# Altium PCB Skumpad.PcbDoc
Units mil, origin at the board's own origin, x right, y up, seen from the top; angles counter-clockwise.
Board outline 4015.75 x 4015.75 mil, 2 copper layers (Top Layer, Bottom Layer); 46 components, 37 nets, 164 pads, 41 vias.
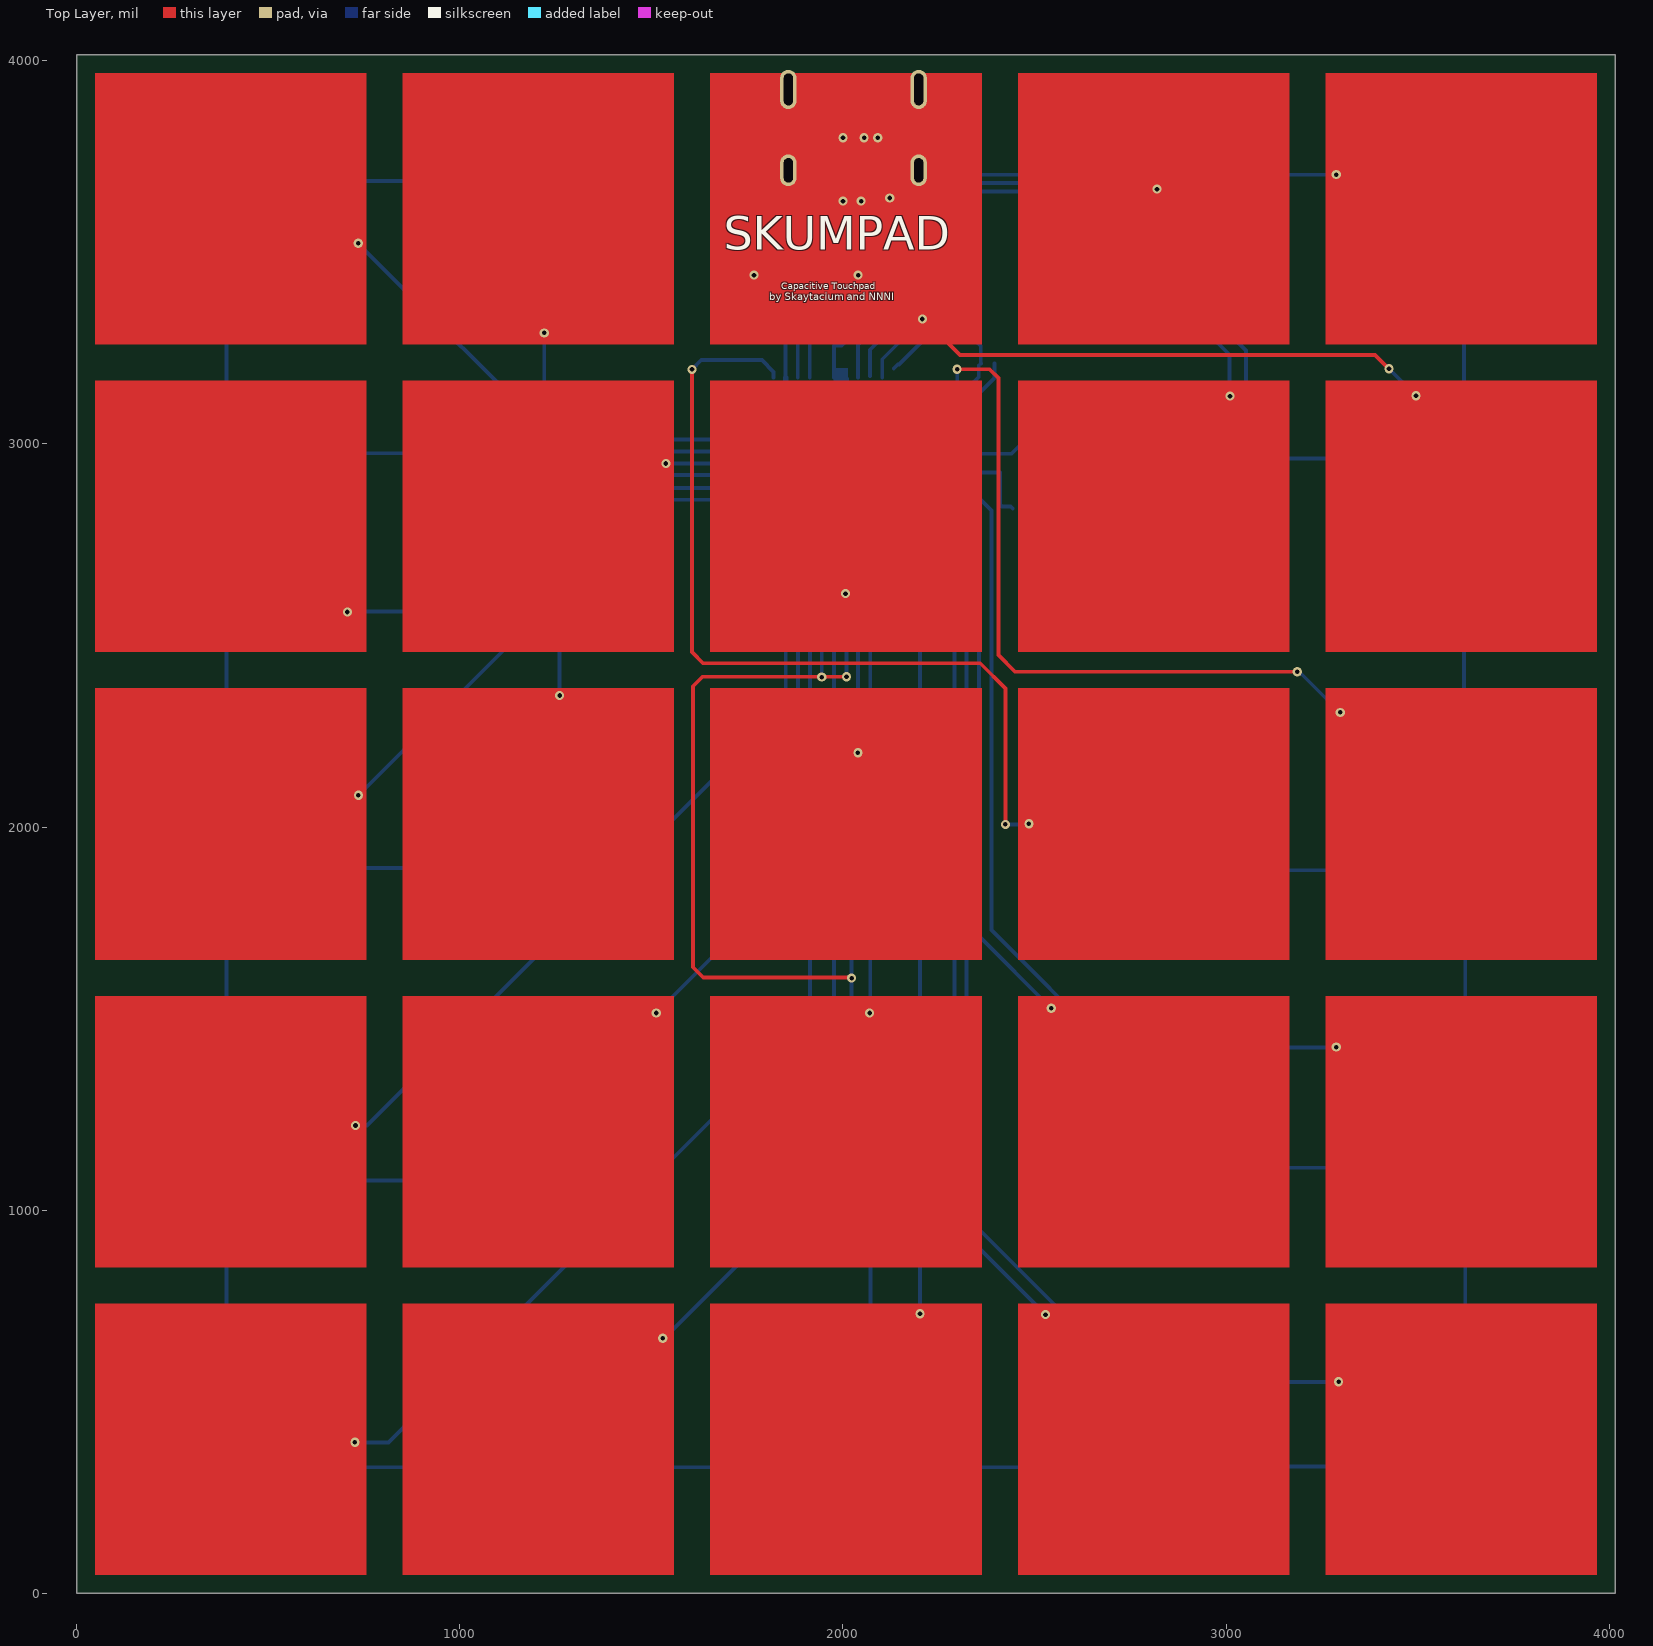
[diagram p0: Top Layer view]
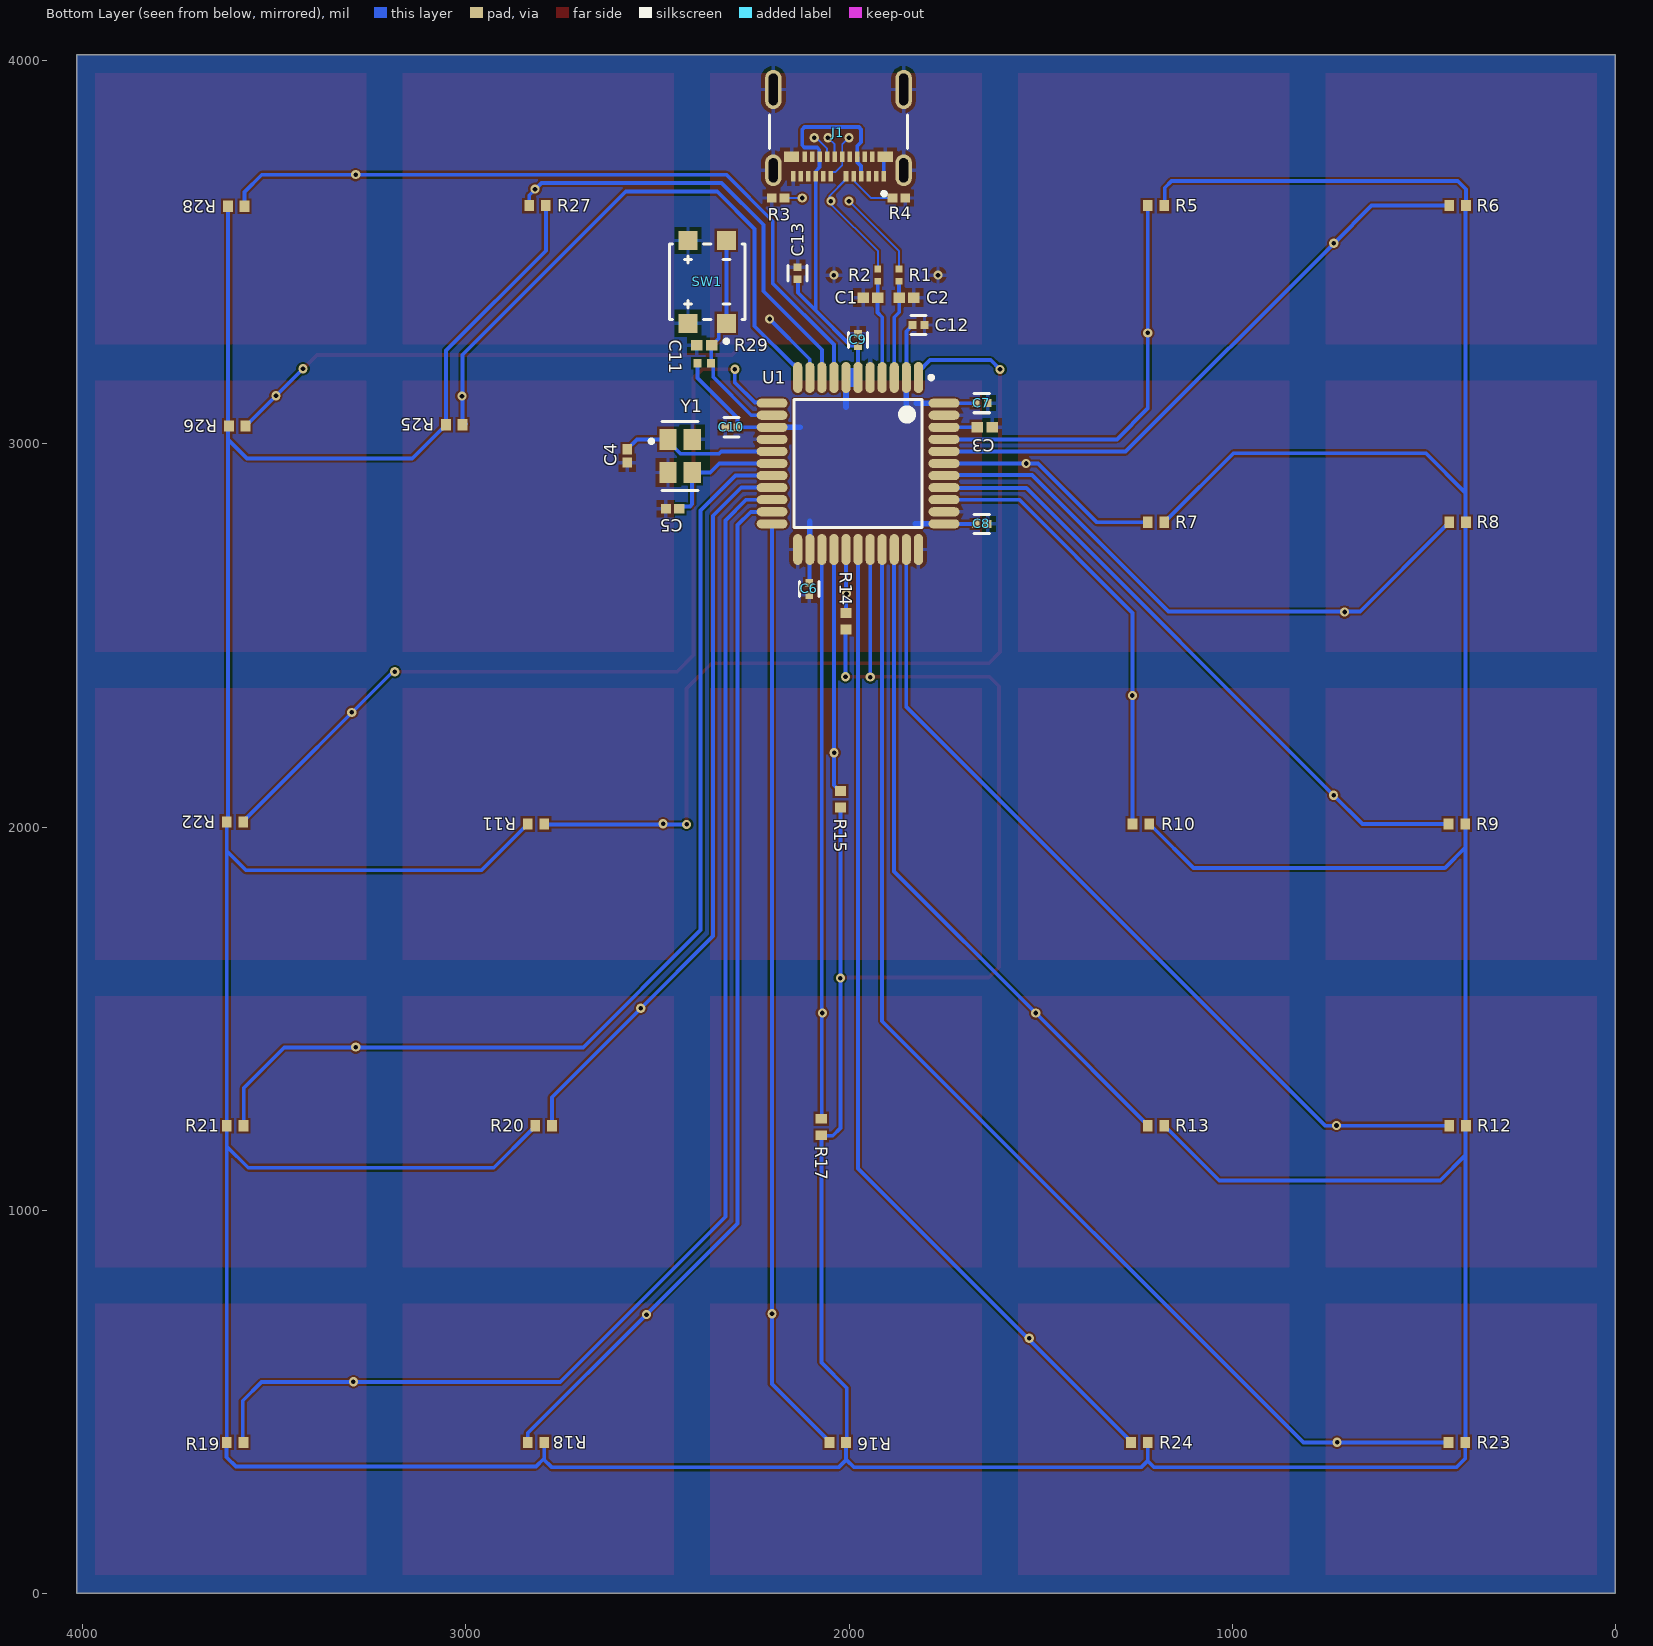
[diagram p1: Bottom Layer view, seen from below]

## Layer stack, top to bottom
Top Solder: solder mask 0.4, Solder Resist, Dk 3.5
Top Layer: signal copper 1.4
Dielectric 1: dielectric 12.6, FR-4, Dk 4.8
Bottom Layer: signal copper 1.4
Bottom Solder: solder mask 0.4, Solder Resist, Dk 3.5

## Board outline
0,0 0,4015.75 4015.75,4015.75 4015.75,0

## Design rules (kind name [scope] priority, off if disabled: settings)
Clearance [All] p1: gap=5 ignorepadtopadclearanceinfootprint=TRUE except(0: Arc-Hole Track-Hole SMDPad-Hole THPad-Hole Via-Hole Fill-Hole Poly-Hole Region-Hole Text-Hole; 10: SMDPad-SMDPad)
PolygonConnect [All] p1: connectstyle=Relief reliefconductorwidth=10 reliefentries=4 polygonreliefangle="90 Angle" airgapwidth=10
RoomDefinition Skematic [InComponentClass('Skematic')] p1: confinementstyle=ConfineIn formatcopy=TRUE lockcomponents=FALSE outline 4059.05,55.12 4279.52,55.12 4279.52,767.71 4059.05,767.71
RoutingVias [All] p1: holewidth=28 width=50 viastyle="Through Hole" minholewidth=28 minwidth=50 maxholewidth=28 maxwidth=50
SolderMaskExpansion [All] p1: expansion=4 istentingtop=FALSE
Width Width_1 [All] p1: maxlimit=50 minlimit=5 preferedwidth=10 minimp=50.000000 maximp=50.000000 favimp=50.000000
30 further rules are at their usual default settings.

## Components (designator, comment, footprint, x,y, rotation, side; value= is the part's Value field where it differs from the comment)
C1 "47pF" CAPC1005X55X30ML05T10 1944.49,3381.5 r180 bottom
C2 "47pF" CAPC1005X55X30ML05T10 1850,3381.5 r180 bottom
C3 "100nF" CAPC1050X55X23ML05T13 1645.67,3043.31 r0 bottom
C4 "22pF" CAPC1005X56X25NL10T15 2578.74,2968.5 r90 bottom
C5 "22pF" CAPC1005X56X25NL10T15 2460.63,2830.71 r180 bottom
C6 "100nF" FP-C0402-BB-MFG 2103.86,2621.58 r270 bottom value="0.10 μF"
C7 "100nF" FP-C0402-BB-MFG 1653.54,3106.3 r180 bottom value="0.10 μF"
C8 "100nF" FP-C0402-BB-MFG 1653.54,2791.34 r180 bottom value="0.10 μF"
C9 "100nF" FP-C0402-BB-MFG 1976.38,3271.65 r90 bottom value="0.10 μF"
C10 "100nF" FP-C0402-BB-MFG 2307.09,3043.31 r0 bottom value="0.10 μF"
C11 "100nF" CAPC1050X55X23ML05T13 2377.95,3257.48 r0 bottom
C12 "100nF" FP-C0402-BB-MFG 1818.76,3310.19 r180 bottom value="0.10 μF"
C13 "100nF" FP-C0402-BB-MFG 2134.15,3445.29 r90 bottom value="0.10 μF"
J1 "1054500101" FP-1054500101-MFG 2027.56,3846.46 r0 bottom
R1 "22R" RESC1005X40X25LL05T05 1869.68,3440.55 r90 bottom
R2 "22R" RESC1005X40X25LL05T05 1924.8,3440.55 r90 bottom
R3 "5.1K" RESC1005X40X25NL10T10 2185.04,3641.73 r0 bottom
R4 "5.1K" RESC1005X40X25NL10T10 1870.08,3641.73 r180 bottom
R5 "1M" RESC0402(1005)_M 1198.82,3622.05 r180 bottom value="1000000.00 Ohm"
R6 "1M" RESC0402(1005)_M 411.42,3622.05 r180 bottom value="1000000.00 Ohm"
R7 "1M" RESC0402(1005)_M 1198.82,2795.28 r180 bottom value="1000000.00 Ohm"
R8 "1M" RESC0402(1005)_M 411.42,2795.28 r180 bottom value="1000000.00 Ohm"
R9 "1M" RESC0402(1005)_M 413.39,2007.87 r180 bottom value="1000000.00 Ohm"
R10 "1M" RESC0402(1005)_M 1238.19,2007.87 r180 bottom value="1000000.00 Ohm"
R11 "1M" RESC0402(1005)_M 2816.93,2007.87 r0 bottom value="1000000.00 Ohm"
R12 "1M" RESC0402(1005)_M 411.42,1220.47 r180 bottom value="1000000.00 Ohm"
R13 "1M" RESC0402(1005)_M 1198.82,1220.47 r180 bottom value="1000000.00 Ohm"
R14 "1M" RESC0402(1005)_M 2007.92,2537.23 r270 bottom value="1000000.00 Ohm"
R15 "1M" RESC0402(1005)_M 2022.23,2072.44 r270 bottom value="1000000.00 Ohm"
R16 "1M" RESC0402(1005)_M 2029.53,393.7 r180 bottom value="1000000.00 Ohm"
R17 "1M" RESC0402(1005)_M 2072.24,1216.89 r270 bottom value="1000000.00 Ohm"
R18 "1M" RESC0402(1005)_M 2816.93,393.7 r180 bottom value="1000000.00 Ohm"
R19 "1M" RESC0402(1005)_M 3602.36,393.7 r0 bottom value="1000000.00 Ohm"
R20 "1M" RESC0402(1005)_M 2797.24,1220.47 r0 bottom value="1000000.00 Ohm"
R21 "1M" RESC0402(1005)_M 3602.36,1220.47 r0 bottom value="1000000.00 Ohm"
R22 "1M" RESC0402(1005)_M 3602.77,2012.98 r0 bottom value="1000000.00 Ohm"
R23 "1M" RESC0402(1005)_M 413.39,393.7 r180 bottom value="1000000.00 Ohm"
R24 "1M" RESC0402(1005)_M 1242.13,393.7 r180 bottom value="1000000.00 Ohm"
R25 "1M" RESC0402(1005)_M 3030.26,3050.31 r0 bottom value="1000000.00 Ohm"
R26 "1M" RESC0402(1005)_M 3596.68,3046.54 r0 bottom value="1000000.00 Ohm"
R27 "1M" RESC0402(1005)_M 2812.99,3622.05 r180 bottom value="1000000.00 Ohm"
R28 "1M" RESC0402(1005)_M 3599.6,3620.32 r0 bottom value="1000000.00 Ohm"
R29 "10K" RESC1005X40X25NL05T05 2377.95,3210.24 r180 bottom
SW1 "7914G-1-000E" BOUR-7914G-1-000E_V 2370.08,3422.83 r0 bottom
U1 "ATmega32U4-AU" 44ML_M 1976.38,2948.82 r270 bottom
Y1 "TSX-3225 16.0000MF18X-AC0" FP-TSX-3225-MFG 2440.94,2968.5 r270 bottom

## Footprints (in the part's own frame and the unit in brackets; to place one, negate y for a bottom-side part, rotate by r counter-clockwise, add the part's x,y. Pads: shape width x height; smd on the part's side, far side on the other; paste and mask are expansions set on the pad)
44ML_M [mm] "Thin QFP, 44-Leads, Body 10x10mm, Pitch 0.8mm, IPC Low Density"
  oval 2.05x0.6 smd: 1(-5.7,4) 2(-5.7,3.2) 3(-5.7,2.4) 4(-5.7,1.6) 5(-5.7,0.8) 6(-5.7,0) 7(-5.7,-0.8) 8(-5.7,-1.6) 9(-5.7,-2.4) 10(-5.7,-3.2) 11(-5.7,-4) 23(5.7,-4) 24(5.7,-3.2) 25(5.7,-2.4) 26(5.7,-1.6) 27(5.7,-0.8) 28(5.7,0) 29(5.7,0.8) 30(5.7,1.6) 31(5.7,2.4) 32(5.7,3.2) 33(5.7,4)
  oval 0.6x2.05 smd: 12(-4,-5.7) 13(-3.2,-5.7) 14(-2.4,-5.7) 15(-1.6,-5.7) 16(-0.8,-5.7) 17(0,-5.7) 18(0.8,-5.7) 19(1.6,-5.7) 20(2.4,-5.7) 21(3.2,-5.7) 22(4,-5.7) 34(4,5.7) 35(3.2,5.7) 36(2.4,5.7) 37(1.6,5.7) 38(0.8,5.7) 39(0,5.7) 40(-0.8,5.7) 41(-1.6,5.7) 42(-2.4,5.7) 43(-3.2,5.7) 44(-4,5.7)
  silkscreen extent -5.82,-4.25 4.25,4.97, body extent -5,-5 5,5, height 1.2
BOUR-7914G-1-000E_V [mm] "SMD, 4-Leads, Body 5x5mm, Height 4.49mm"
  rect 1.27x1.27 smd: 1(-1.27,2.75) 2(1.27,2.75) 3(1.27,-2.75) 4(-1.27,-2.75)
  silkscreen extent -2.5,-2.5 2.5,4.06, body extent -2.5,-3.1 2.5,3.1, height 4.11
CAPC1005X55X30ML05T10 [mm] "Chip Capacitor, 2-Leads, Body 1.00x0.50mm, IPC Low Density"
  rect 0.76x0.72 smd: 1(-0.48,0) 2(0.48,0)
  body extent -0.53,-0.28 0.53,0.27, height 0.55
CAPC1005X56X25NL10T15 [mm] "Chip Capacitor, 2-Leads, Body 1.00x0.50mm, IPC Medium Density"
  rect 0.68x0.64 smd: 1(-0.44,0) 2(0.44,0)
  body extent -0.55,-0.3 0.55,0.3, height 0.56
CAPC1050X55X23ML05T13 [mm] "Chip Capacitor, 2-Leads, Body 1.05x0.55mm, IPC Low Density"
  rect 0.76x0.72 smd: 1(-0.49,0) 2(0.49,0)
  body extent -0.53,-0.28 0.53,0.27, height 0.55
FP-1054500101-MFG [mm]
  rrect100% 1.1x2.1 hole 1.6 slot 0.6 at 0 deg paste-1000 mask+0: 1(-4.32,3.36) 2(4.32,3.36)
  rrect100% 1.1x2.6 hole 2.1 slot 0.6 at 0 deg paste-1000 mask+0: 3(-4.32,-2) 4(4.32,-2)
  rect 0.3x0.7 smd paste+0 mask+0: A1(-3,3.77) A2(-2.5,3.77) A3(-2,3.77) A4(-1.5,3.77) A5(-1,3.77) A6(-0.5,3.77) A7(0.5,3.77) A8(1,3.77) A9(1.5,3.77) A10(2,3.77) A11(2.5,3.77) A12(3,3.77) B2(2.25,2.47) B3(1.75,2.47) B4(1.25,2.47) B5(0.75,2.47) B6(0.25,2.47) B7(-0.25,2.47) B8(-0.75,2.47) B9(-1.25,2.47) B10(-1.75,2.47) B11(-2.25,2.47)
  rect 1x0.7 smd paste+0 mask+0: B1(3.1,2.47) B12(-3.1,2.47)
  silkscreen extent -4.57,-0.3 4.57,5.03
FP-C0402-BB-MFG [mm]
  rect 0.52x0.52 smd paste+0 mask+0: 1(-0.4,0) 2(0.4,0)
  silkscreen extent -0.5,-0.64 0.5,0.64, body extent -0.5,-0.25 0.5,0.25, height 0.55
FP-TSX-3225-MFG [mm]
  rect 1.4x1.15 smd paste+0 mask+0: 1(-1.1,-0.8) 2(1.1,-0.8) 3(1.1,0.8) 4(-1.1,0.8)
  silkscreen extent -2.3,-2.02 2.3,1.2, body extent -1.6,-1.25 1.6,1.25, height 0.6
RESC0402(1005)_M [mm] "Chip Resistor, Body 1.0x0.5mm, IPC Low Density"
  rect 0.65x0.75 smd: 1(-0.55,0) 2(0.55,0)
  body extent -0.52,-0.28 0.53,0.28, height 0.4
RESC1005X40X25LL05T05 [mm] "Chip Resistor, 2-Leads, Body 1.00x0.50mm, IPC High Density"
  rect 0.45x0.45 smd: 1(-0.4,0) 2(0.4,0)
  body extent -0.53,-0.27 0.53,0.28, height 0.4
RESC1005X40X25NL05T05 [mm] "Chip Resistor, 2-Leads, Body 1.00x0.50mm, IPC Medium Density"
  rect 0.55x0.55 smd: 1(-0.45,0) 2(0.45,0)
  body extent -0.53,-0.27 0.53,0.28, height 0.4
RESC1005X40X25NL10T10 [mm] "Chip Resistor, 2-Leads, Body 1.00x0.50mm, IPC Medium Density"
  rect 0.65x0.6 smd: 1(-0.425,0) 2(0.425,0)
  body extent -0.55,-0.3 0.55,0.3, height 0.4

## Part data
C1 C2: library part CMP-2008-03283-1, Manufacturer=Kemet, Part Number=C0402C470J5GACTU
C3 C11: library part CMP-2000-05439-1, "Chip Capacitor, 100 nF, +/- 10%, 16 V, -55 to 125 degC, 0402 (1005 Metric), RoHS, Tape and Reel", Capacitance=100000pF, Case Size/Dimension=0402, Dielectric=X7R, Manufacturer="Samsung Electro-Mechanics", Rated Voltage=16V, Tolerance (%)=±10%, Datasheet URL=https://datasheet.ciiva.com/29198/458718-da-01-en-vs-kondensator-0402-29198423.pdf, Datasheet Version=Nov-10, Manufacturer URL=http://www.samsungsem.com/global/index.jsp
C4 C5: library part CMP-2008-02613-1, Manufacturer="AVX Interconnect / Elco", Part Number=04025A220JAT2A
C6 C7 C8 C9 C10 C12 C13: library part CMP-03020-023811-1, "CAP CER 0.1UF 10V X5R 0402", Capacitance="0.10 μF", Manufacturer=Kemet, Manufacturer Part Number=C0402C104K8PACTU, Package=C0402-BB, Temperature="-55°C to +125°C", Temperature Characteristic=X5R, Temperature Coefficient=15%, Temperature Range High=+125°C, Temperature Range Low=-55°C, Tolerance=0.1, Voltage Rating="10 V", Automotive=No, Category=Cap, ComponentLink2Description=Datasheet, ComponentLink2URL=https://content.kemet.com/datasheets/KEM_C1002_X7R_SMD.pdf, Device Class L1="Passive Components", Device Class L2=Capacitors, Device Class L3="Ceramic Capacitors", Digikey Description="CAP CER 0.1UF 10V X5R 0402", Height=0.55mm, Ipc Land Pattern Name=CAPC10050X50, Lead Free=Yes, Material=Ceramic, Mouser Description="Capacitor 100 nF 10 VDC 0402", Octopart=https://octopart.com/c0402c104k8pactu-kemet-140039, RoHS=TRUE
J1: library part CMP-04767-000004-1, "CONN RCP USB3.1 TYPEC 24P SMD RA", Current Rating=0.25/1.25/5A, Manufacturer=Molex, Package=0, Temperature="-30°C to +85°C", Temperature Range High=+85°C, Temperature Range Low=-30°C, Voltage Rating=30V, Automotive=No, Category=Conn, ComponentLink2Description=Datasheet, ComponentLink2URL=https://www.molex.com/webdocs/datasheets/pdf/en-us/1054500101_IO_CONNECTORS.pdf, Conn Orientation="Right Angle", Contact Material=Gold,Nickel, Device Class L1=Connectors, Device Class L2="USB Connectors", Device Class L3=unset, Digikey Description="CONN RCP USB3.1 TYPEC 24P SMD RA", Footprint Url=https://www.molex.com/pdm_docs/sd/1054500101_sd.pdf, Height=3.44mm, Is Female=yes, Lead Free=Yes, Manufacturer Part Number=1054500101, Mouser Description="USB Shielded I/O Receptacle; Type C; Right Angle; Surface Mount; Gold over Nickel", Number Of Contacts=24, Octopart=https://octopart.com/105450-0101-molex-68082325, Pitch=0.5mm, RoHS=TRUE, Shielding=true, Usb Standard="USB 3.1"
R1 R2: library part CMP-2002-08382-1, Manufacturer="Vishay Dale", Part Number=CRCW040222R0FKED
R3 R4: library part CMP-2002-05812-1, Manufacturer=Panasonic, Part Number=ERA-2AEB512X
R5 R6 R7 R8 R9 R10 R11 R12 R13 R14 R15 R16 R17 R18 R19 R20 R21 R22 R23 R24 R25 R26 R27 R28: library part CMP-1011-00849-1, "1M 0.063W 1% 0402 (1005 Metric)  SMD", Case-EIA=0402, Case-Metric=1005, Power="0.063 W", Tolerance="1 %", Technology=SMT
R29: library part CMP-2002-01183-1, Manufacturer=Panasonic, Part Number=ERT-J0ER103J
SW1: library part CMP-2000-05692-1, "SPST Gull Wing Sealed Key Switch, 100 mA, 16 V, -55 to 125 degC, 4-Pin SMD, RoHS, Tape and Reel", Actuator Color=N/A, Contact Rating @ Voltage=0.1A, Dielectric Strength=250VAC, Manufacturer=Bourns, Maximum AC Voltage Rating=16V, Maximum Contact Resistance=100mOhm, Minimum Insulation Resistance=100MOhm, Operating Force=2.94N, Operating Temperature=-55to125C, Package Description="4-Pin Surface Mount Device, Body 5 x 5 mm, Height 4.49 mm", Actuator Length=1.65mm, Actuator Style=RoundButton, Base Material=Thermoplastic, Body Orientation=Straight, Contact Material=Gold, Contact Plating=N/A, COO=TW, Datasheet URL=http://www.bourns.com/docs/Product-Datasheets/7914.pdf, Datasheet Version=08/2016, Dimension=5x6.2x4.19mm, ECCN=EAR99, Electrical Life=N/A, Family=7914, Ground Terminal=No, Housing Material=N/A, HTS=8536509065, Illumination Type=N/R, Manufacturer URL=http://www.bourns.com/, Maximum DC Voltage Rating=16V, Mechanical Life=100000Cycles, Mounting=SurfaceMount,GullWing, Mounting Technology=SurfaceMount, Package Reference=7914G-1-000E, Packaging=EmbossedTapeandReel, Part No=7914G-1-000E, Pole Throw Configuration=SPST, Product Weight=N/A, RoHS=Yes, Seal Description=N/A, Seal Location=N/A, Supplier=Bourns, Switch Configuration=N.O., Type=KeySwitch
U1: library part CMP-0095-00285-2, "8-bit AVR Microcontroller, 2.7-5.5V, 16MHz, 32KB Flash, 1KB EEPROM, 2.5KB SRAM, USB Controller, 44-pin TQFP, Industrial Grade (-40°C to 85°C), Ext Osc", ComponentLink1Description="Manufacturer URL", ComponentLink1URL=http://www.atmel.com/, ComponentLink2Description="ATmega16U4/32U4 Datasheet", ComponentLink2URL=http://www.atmel.com/dyn/resources/prod_documents/doc7766.pdf, ComponentLink3Description="ATmega16U4 ATmega32U4 Summary", ComponentLink3URL=http://www.atmel.com/dyn/resources/prod_documents/7766S.pdf, DatasheetVersion="revF, Nov-2010", PackageDescription="44-Pin Plastic Thin Quad Flat Pack, 10 x 10 x 1.0 mm Body, 0.8 mm Pitch (TQFP)", PackageReference=44ML, PackageVersion="rev.G, Jul-2007", RevisionNote="DatasheetVersion updated. URLs added."
Y1: library part CMP-36405-000005-1, "CRYSTAL 16.00 MHZ 9PF SMD", Frequency=16MHz, Load Capacitance=9pF, Manufacturer=EPSON, Package=TSX-3225, Temperature="-40°C to +85°C", Temperature Range High=+85°C, Temperature Range Low=-40°C, Tolerance=10ppm, Automotive=No, Category=Crys, ComponentLink2Description=Datasheet, ComponentLink2URL=https://support.epson.biz/td/api/doc_check.php?dl=brief_TSX-3225&lang=en, Device Class L1="Passive Components", Device Class L2="Crystals / Oscillators", Device Class L3=Crystals, Digikey Description="CRYSTAL 16.00 MHZ 9PF SMD", ESR=60Ω, Height=0.6mm, Lead Free=Yes, Manufacturer Part Number="TSX-3225 16.0000MF18X-AC0", Mouser Description="CRYSTAL 16.00 MHZ 9PF SMD", Octopart=https://octopart.com/tsx-3225+16.0000mf18x-ac0-epson-58756552, RoHS=TRUE, Series=TSX-3225, Stability=18ppm

## Via types
v1: diameter 24, hole 12, Top Layer to Bottom Layer, tented top, 24 vias
v2: diameter 24, hole 12, Top Layer to Bottom Layer, 17 vias

## Nets (pads, with @x,y where several pads share a name; then routed paths per layer and width w, separated by ;. In a path a pad name is that pad's centre, name@x,y a point inside that pad or via, vN(x,y) a via of type N, cw(c..) or ccw(c..) an arc to the next point about the centre after c; other vN are vias at no path point)
+5: C6.1 C7.1 C8.1 C9.1 C10.1 C12.1 C13.1 J1.A4 J1.A9 J1.B4 J1.B9 R29.1 U1.2 U1.6 U1.7 U1.14 U1.24 U1.34 U1.44 | length 2266.6
  Bottom Layer w10: C8.1 U1.34 ; C7.1 U1.44 ; C12.1@1835.54,3309.15 1839.74,3304.95 1839.74,3304.64 1850.22,3294.16 1850.22,3225.98 U1.2@1850.22,3173.99 ; U1.2 U1.2@1850.9,3172.72 ; J1.A4 1968.5,3725.23 1977.44,3734.16 1977.44,3748.31 J1.B9 1978.35,3777.56 1968.5,3787.4 1968.5,3820.91 1974.36,3826.77 2116.19,3826.77 2122.05,3820.91 2122.05,3779.6 2116.19,3773.74 2083.54,3773.74 2077.68,3767.88 2077.68,3750.12 J1.B4 2076.77,3722.02 2085.71,3713.08 2085.71,3698.94 J1.A9 2086.61,3347.71 ; U1.6 C9.1 1977.32,3256.85 1995.76,3256.85 2086.61,3347.71 ; U1.24@2102.23,2722.61 2103.11,2721.74 2103.11,2638.07 C6.1 ; C13.1@2133.45,3429.09 2133.45,3394.54 2086.61,3347.71 ; U1.14 C10.1 2291.34,3067.93 2395.67,3172.26 R29.1
  Bottom Layer w15: U1.44 1824.69,3106.3 ; U1.34@1754.38,2791.34 1827.1,2791.34 ; 1850.9,3100 U1.2@1850.9,3172.72 ; 2007.87,3096.57 U1.7@2007.87,3169.29 ; U1.24 2102.36,2797.13 ; 2128.07,3043.31 U1.14
GND: C1.1 C2.2 C3.1 C4.1 C5.1 C6.2 C7.2 C8.2 C9.2 C10.2 C11.2 C12.2 C13.2 J1.1 J1.2 J1.3 J1.4 J1.A1 J1.A12 J1.B1 J1.B12 R3.2 R4.2 SW1.2 SW1.3 U1.5 U1.15 U1.23 U1.33 U1.35 U1.43 Y1.2 Y1.4 | length 52.8
  Bottom Layer w10: J1.B12 1909.45,3745.28 J1.A1
  other v2: 1767.72,3440.55 2039.37,3440.55
NetC1_2: C1.2 R2.1 U1.4 | length 257
  Bottom Layer w10: U1.4 1913.39,3330.71 1925.59,3342.91 C1.2 1925.2,3381.89 1925.2,3424.41 R2.1
NetC2_1: C2.1 R1.1 U1.3 | length 257.3
  Bottom Layer w10: R1.1 1869.29,3424.41 1869.29,3381.89 C2.1 1868.9,3343.7 1881.89,3330.71 U1.3
NetC3_2: C3.2 U1.42 | length 87
  Bottom Layer w10: C3.2 U1.42
NetC4_2: C4.2 U1.16 Y1.1 | length 410.1
  Bottom Layer w10: U1.16 2332.89,2980.31 2338.96,2974.25 2439.8,2974.25 2472.44,3006.89 Y1.1 2553.54,3011.81 2578.74,2986.61 C4.2
NetC5_2: C5.2 U1.17 Y1.3 | length 339.9
  Bottom Layer w10: U1.17 2338.58,2948.82 2362.2,2925.2 Y1.3 2409.45,2842.52 2415.31,2836.66 2437.35,2836.66 C5.2
NetC11_1: C11.1 R29.2 SW1.1 SW1.4 U1.13 | length 562.5
  Bottom Layer w10: U1.13 2255.03,3074.8 2354.41,3174.18 R29.2@2354.41,3204.41 ; SW1.4 SW1.1 2340.08,3294.57 2340.08,3275.28 2359.45,3255.91 2359.45,3211.02 R29.2
NetJ1_A5: J1.A5 R4.1 | length 130.9
  Bottom Layer w5: R4.1 1942.5,3641.73 1984.78,3684.02 1984.78,3694.63 J1.A5
NetJ1_A6: J1.A6 J1.B6 R2.2 | length 548.2
  Top Layer w5: v2(2047.24,3633.86) 2047.24,3791.34 v2(2055.12,3799.21)
  Bottom Layer w5: R2.2 1924.8,3503.54 2047.24,3625.98 v2(2047.24,3633.86) 2047.85,3633.86 2051.48,3637.49 2051.48,3646.55 2007.87,3690.16 J1.A6 J1.A6@2011.28,3701.44 ; J1.B6@2034,3745.81 J1.B6 2037.4,3781.5 v2(2055.12,3799.21)
NetJ1_A7: J1.A7 J1.B7 R1.2 | length 522
  Top Layer w5: v2(2000,3633.86) v2(2000,3799.21)
  Bottom Layer w5: R1.2 1869.68,3503.54 v2(2000,3633.86) ; v2(2000,3799.21) 2017.72,3781.5 J1.B7 2017.72,3727.93 2036.34,3709.31 2043.84,3709.31 2047.24,3705.91 J1.A7
NetJ1_B5: J1.B5 R3.1 | length 283.4
  Top Layer w5: v2(2090.55,3799.21) 2122.05,3767.72 v2(2122.05,3641.73)
  Bottom Layer w5: J1.B5 2057.09,3770.49 2085.81,3799.21 v2(2090.55,3799.21) ; v2(2122.05,3641.73) R3.1
NetR5_1: R5.1 U1.41 | length 1094.7
  Bottom Layer w10: R5.1 1220.47,3289.7 1220.47,3092.13 1300.79,3011.81 U1.41
  other v1: 1220.11,3289.7
NetR5_2: R5.2 R6.2 R7.2 R8.2 R9.2 R10.2 R11.2 R12.2 R13.2 R14.2 R15.2 R16.2 R17.2 R18.2 R19.2 R20.2 R21.2 R22.2 R23.2 R24.2 R25.2 R26.2 R27.2 R28.2 U1.29 | length 20303.4
  Top Layer w10: v2(2009.14,2392.29) 1633.6,2392.29 1608.62,2367.32 1608.62,1633.89 1635.37,1607.14 v2@2022.61,1607.14
  Bottom Layer w10: R23.2@390.75,398.51 390.75,1143.54 ; R23.2 391.73,351.5 414.2,329.02 1203.58,329.02 1220.47,345.92 ; R13.2@1176.14,1220.85 1176.14,1217.47 1169.37,1210.71 1166.69,1210.71 1033.5,1077.51 456.78,1077.51 390.75,1143.54 ; R7.2 1177.17,2797.24 1169.37,2805.04 1167.4,2805.04 996.9,2975.54 494.24,2975.54 390.75,2872.05 ; R5.2 1177.17,3624.61 1175.83,3625.94 1175.83,3668.43 1158.2,3686.07 411.02,3686.07 389.76,3664.82 R6.2 390.75,3621.06 390.75,2872.05 ; R10.2@1215.14,2007.51 1215.14,2004.51 1208.74,1998.11 1205.74,1998.11 1100.6,1892.97 444.86,1892.97 390.75,1947.08 ; R24.2 1220.47,345.92 ; v2@1944.18,2394.64 1944.63,2395.09 1944.63,2724.16 U1.29 ; 2005.29,346.84 1987.55,329.1 1236.47,329.1 1220.47,345.1 1220.47,345.92 ; R16.2@2005.91,402.89 2005.91,536.18 2072.24,602.52 R17.2 ; R14.2@2007.21,2514.48 2009.14,2512.55 v2(2009.14,2392.29) ; R16.2 2007.87,347.67 2026.44,329.1 2776.85,329.1 2796.63,348.89 2796.63,350.93 ; R15.2 2022.23,1214.59 2042.48,1194.34 R17.2@2071.2,1194.34 ; R27.2 2791.34,3504.05 3051.91,3243.48 R25.2 ; R18.2 2795.28,352.29 2796.63,350.93 ; R20.2@2817.91,1219.98 2817.91,1219.49 2826.69,1210.71 2827.19,1210.71 2927.41,1110.48 3568.03,1110.48 3624.02,1166.47 ; R11.2 2959.38,1887.07 3574.23,1887.07 3624.22,1937.06 ; R25.2@3051.91,3048.34 3059.71,3040.55 3061.67,3040.55 3139.94,2962.28 3571.15,2962.28 3620.66,3011.79 ; R28.2 3620.66,3619.73 3620.66,3011.79 ; R21.2 3624.02,1166.47 ; R21.2@3624.43,1224.93 3624.22,1225.15 3624.22,1937.06 ; 390.75,1143.54 390.75,1947.08 ; 390.75,1947.08 390.75,2872.05 ; 2796.63,350.93 2817.1,330.47 3600.25,330.47 3624.81,355.03 3624.81,397.32 3624.02,398.11 3624.02,1166.47 ; 3620.66,3011.79 3620.66,2016.74 R22.2 3624.22,2012.78 3624.22,1937.06
  other v2: 2022.5,1605.69 1944.38,2391.38
NetR6_1: R6.1 U1.40 | length 1585.2
  Bottom Layer w10: R6.1 635.87,3622.05 734.58,3523.34 1278.16,2979.76 1751.41,2979.76 U1.40
  other v1: 734.91,3523.67
NetR7_1: R7.1 U1.39 | length 597.5
  Bottom Layer w10: R7.1 1352.85,2795.28 1506.47,2948.9 1537.71,2948.9 U1.39@1754.38,2948.9
  other v1: 1537.71,2948.78
NetR8_1: R8.1 U1.38 | length 1564.6
  Bottom Layer w10: R8.1 433.07,2793.31 440.87,2785.51 442.83,2785.51 665.75,2562.6 706.38,2562.6 1166.41,2562.6 1522.33,2918.51 1751.33,2918.51 U1.38@1752.28,2917.55
  other v1: 706.38,2561.17
NetR9_1: R9.1 U1.37 | length 1677.7
  Bottom Layer w10: R9.1 659.94,2007.87 v1(735.14,2083.06) 1537.18,2885.11 U1.37@1749.42,2885.11
NetR10_1: R10.1 U1.36 | length 1169.6
  Bottom Layer w10: R10.1 1259.84,2343.27 1259.84,2558.86 1555.31,2854.33 U1.36 1752.98,2854.33 U1.36@1755.14,2856.49
  other v1: 1260.31,2343.27
NetR11_1: R11.1 U1.1 | length 2572.7
  Top Layer w10: v2(1605.85,3194.34) 1605.85,2456.62 1635,2427.47 2358.11,2427.47 2424.06,2361.52 v2(2424.06,2006.75)
  Bottom Layer w10: v2(1605.85,3194.34) 1630.1,3218.58 1788.2,3218.58 1818.9,3187.89 U1.1 ; v2(2424.06,2006.75) R11.1@2796.26,2006.75
  other v1: 2485.15,2008.37
NetR12_1: R12.1 U1.32 | length 2274
  Bottom Layer w10: R12.1 727.57,1220.47 757.99,1220.47 1850.39,2312.88 U1.32@1850.39,2717.1
  other v1: 727.57,1221.04
NetR13_1: R13.1 U1.31 | length 1773.7
  Bottom Layer w10: R13.1 1220.47,1222.44 1512.68,1514.64 1882.33,1884.3 U1.31@1882.33,2720.04
  other v1: 1512.84,1514.48
NetR14_1: R14.1 U1.27 | length 163.9
  Bottom Layer w5: R14.1@2007.16,2559.65 R14.1 ; U1.27@2007.87,2722.5 U1.27@2008.59,2723.22
  Bottom Layer w10: R14.1@2007.87,2560.7 2007.87,2609.33 U1.27@2007.87,2722.5
  other v1: 2006.65,2609.33
NetR15_1: R15.1 U1.26 | length 638.6
  Bottom Layer w10: R15.1 2024.2,2094.09 2039.06,2108.95 2039.06,2193.87 2039.06,2724.1 U1.26
  other v1: 2039.03,2193.87
NetR16_1: R16.1 U1.22 | length 2458.9
  Bottom Layer w10: R16.1 2051.18,395.67 2201.42,545.91 2201.42,729.66 U1.22@2201.42,2790.34
  other v1: 2200.91,729.66
NetR17_1: R17.1 U1.25 | length 1491.2
  Bottom Layer w10: U1.25@2071.01,2725.31 2071.01,1514.57 2071.01,1246.01 2078.8,1238.22 R17.1@2079.67,1238.22
  other v1: 2069.55,1514.57
NetR18_1: R18.1 U1.21 | length 2721.5
  Bottom Layer w10: U1.21@2205,2822.49 2256.65,2822.49 2291.04,2788.1 2291.04,965.46 2528.96,727.54 2838.58,417.92 R18.1
  other v1: 2528.69,727.27
NetR19_1: R19.1 U1.20 | length 3526.7
  Bottom Layer w10: U1.20 2268.64,2854.33 2322.61,2800.36 2322.61,982.64 2753.89,551.37 3293.62,551.37 3533.3,551.37 3582.29,502.38 R19.1@3582.29,396.16
  other v1: 3293.62,552.25
NetR20_1: R20.1 U1.19 | length 1948.4
  Bottom Layer w10: U1.19 2281.31,2885.83 2354.72,2812.42 2354.72,1715.68 2543.67,1526.73 2775.59,1294.8 R20.1@2775.59,1222.67
  other v1: 2543.79,1526.85
NetR21_1: R21.1 U1.18 | length 2779.8
  Bottom Layer w10: U1.18 2296.53,2917.32 2387.31,2826.54 2387.31,1730.97 2693.73,1424.55 3287.4,1424.55 3474.15,1424.55 3579.97,1318.73 R21.1@3579.97,1222.09
  other v1: 3287.4,1425.57
NetR22_1: R22.1 U1.12 | length 2353.5
  Top Layer w10: v2@2300.15,3199.29 2304.45,3194.98 2382.73,3194.98 2405.92,3171.79 2405.92,2448.67 2449.34,2405.25 v2(3185.5,2405.25)
  Bottom Layer w10: U1.12 2202.4,3107.91 2245.63,3107.91 2298.13,3160.41 v2@2298.13,3194.37 ; v2(3185.5,2405.25) 3190.81,2405.25 3580.78,2015.28 R22.1@3580.78,2010.18
  other v1: 3297.86,2299.07
  other v2: 2297.99,3194.98
NetR23_1: R23.1 U1.30 | length 3168.3
  Bottom Layer w10: R23.1 725.95,393.7 814.06,393.7 1913.53,1493.18 U1.30@1913.53,2727.57
  other v1: 725.95,393.96
NetR24_1: R24.1 U1.28 | length 2625.2
  Bottom Layer w10: R24.1 1263.78,395.67 1531.61,663.5 1976.38,1108.27 1976.38,2722.67 U1.28@1977.13,2723.43
  other v1: 1529.52,665.6
NetR25_1: R25.1 U1.11 | length 1579.3
  Bottom Layer w10: U1.11@2132.37,3196.6 2142.83,3207.06 2146.49,3207.06 2246.44,3307.01 2246.44,3561.07 2343.84,3658.48 2582.79,3658.48 3008.6,3232.67 3008.6,3124.83 R25.1 ; R25.1@2999.75,3051.91 R25.1@3003.99,3051.91
  other v1: 3010.27,3124.83
NetR26_1: R26.1 U1.10 | length 1674.3
  Top Layer w10: v2(2207.21,3325.91) 2212.12,3325.91 2305.59,3232.44 3388.9,3232.44 v2@3424.23,3197.11
  Bottom Layer w10: U1.10 2102.36,3221.06 v2(2207.21,3325.91) ; v2(3425.16,3196.18) R26.1@3572.12,3049.22
  other v1: 3495.74,3125.76
NetR27_1: R27.1 U1.9 | length 1154.2
  Bottom Layer w10: U1.9@2070.72,3177.52 2070.72,3245.62 2223.59,3398.49 2223.59,3572 2332.73,3681.13 2802.39,3681.13 2819.12,3664.4 2834.65,3648.87 R27.1
  other v1: 2819.64,3664.92
NetR28_1: R28.1 U1.8 | length 1959.1
  Bottom Layer w10: U1.8 2039.37,3259.48 2198.89,3419.01 2198.89,3581.29 2320.12,3702.51 3287.68,3702.51 3532.68,3702.51 3577.95,3657.25 R28.1
  other v1: 3287.68,3702.77
pads on no net: J1.A2 J1.A3 J1.A8 J1.A10 J1.A11 J1.B2 J1.B3 J1.B8 J1.B10 J1.B11

## Polygon pours and split planes (outlines as drawn)
+5 on Bottom Layer "+5_L02_P003" (solid, pour order 3): 1809.05,3116.14 1809.05,2781.5 2143.7,2781.5 2143.7,3116.14
GND on Bottom Layer "GND_L02_P001" (solid, remove dead copper, pour order 1): 0,4015.75 4015.75,4015.75 4015.75,0 0,0
GND on Bottom Layer "NONET_L02_P002" (hatched 45Degree grid 35 track 8, remove dead copper, shelved, pour order 2): 0,4015.75 4015.75,4015.75 4015.75,0 0,0

## Other copper
Top Layer:
  rectangle net GND: 1653.54,3259.84 2362.2,3968.5
  rectangle net NetR13_1: 850.39,850.39 1559.06,1559.06
  rectangle net NetR17_1: 1653.54,850.39 2362.2,1559.06
  rectangle net NetR19_1: 3259.84,47.24 3968.5,755.91
  rectangle net NetR21_1: 3259.84,850.39 3968.5,1559.06
  rectangle net NetR22_1: 3259.84,1653.54 3968.5,2362.2
  rectangle net NetR26_1: 3259.84,2456.69 3968.5,3165.35
  rectangle net NetR28_1: 3259.84,3259.84 3968.5,3968.5
  rectangle net NetR6_1: 47.24,3259.84 755.91,3968.5
  rectangle net NetR8_1: 47.24,2456.69 755.91,3165.35
  rectangle: 47.24,1653.54 755.91,2362.2
  rectangle net NetR12_1: 47.24,850.39 755.91,1559.06
  rectangle net NetR23_1: 47.24,47.24 755.91,755.91
  rectangle net NetR24_1: 850.39,47.24 1559.06,755.91
  rectangle net NetR10_1: 850.39,1653.54 1559.06,2362.2
  rectangle net NetR7_1: 850.39,2456.69 1559.06,3165.35
  rectangle net NetR5_1: 850.39,3259.84 1559.06,3968.5
  rectangle net NetR14_1: 1653.54,2456.69 2362.2,3165.35
  rectangle net NetR15_1: 1653.54,1653.54 2362.2,2362.2
  rectangle net NetR16_1: 1653.54,47.24 2362.2,755.91
  rectangle net NetR18_1: 2456.69,47.24 3165.35,755.91
  rectangle net NetR20_1: 2456.69,850.39 3165.35,1559.06
  rectangle net NetR11_1: 2456.69,1653.54 3165.35,2362.2
  rectangle net NetR25_1: 2456.69,2456.69 3165.35,3165.35
  rectangle net NetR27_1: 2456.69,3259.84 3165.35,3968.5
Bottom Layer:
  region net +5: 1976.38,3196.85 1976.38,3149.61 2011.49,3149.61 2011.81,3149.93 2011.81,3196.85

## Silkscreen, mask and mechanical layers (free items; w line width, h text height)
Top Overlay:
  text "SKUMPAD" at 1688.98,3478.04 h150
  text "Capacitive Touchpad" at 1838.27,3397.64 h30
  text "by Skaytacium and NNNI" at 1807.09,3368.33 h32
Top Solder:
  text "sk num" at 170.68,3602.36 h78.74
  text "sk div" at 984.32,3602.36 h78.74
  text "sk mult" at 2572.26,3602.36 h78.74
  text "sk sub" at 3405.51,3602.36 h78.74
  text "sk =1" at 223.15,2795.28 h78.74
  text "sk 7" at 1056.48,2795.28 h78.74
  text "sk 9" at 2650.97,2795.28 h78.74
  text "sk add" at 3399.02,2795.28 h78.74
  text "sk 8" at 1863.56,2775.59 h78.74
  text "sk =2" at 210.03,1988.19 h78.74
  text "sk 4" at 1056.48,1988.19 h78.74
  text "sk 5" at 1863.56,1988.19 h78.74
  text "sk 6" at 2670.65,1972.44 h78.74
  text "sk / add/ent" at 3351.83,1902.87 h78.74
  text "sk 2" at 1863.56,1181.1 h78.74
  text "sk 3" at 2670.65,1181.1 h78.74
  text "sk ent" at 3392.46,1181.1 h78.74
  text "sk =3" at 210.03,1161.42 h78.74
  text "sk 1" at 1069.6,1161.42 h78.74
  text "sk x" at 1056.48,374.02 h78.74
  text "sk x" at 1863.56,374.02 h78.74
  text "sk 0" at 2670.65,374.02 h78.74
  text "sk del" at 3412.14,374.02 h78.74
  text "sk z" at 269.41,369.7 h78.74